# EAGLE board tempSensorV1 (EAGLE 7.2.0)
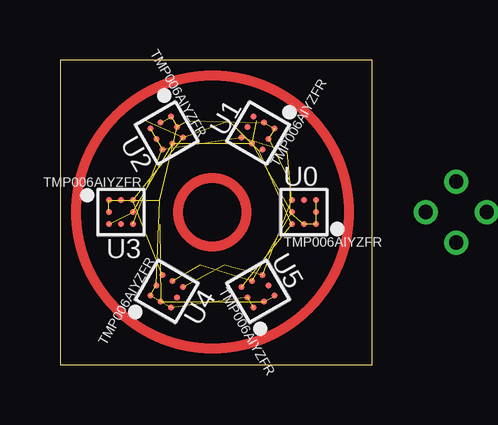
[diagram p0: board, top side]
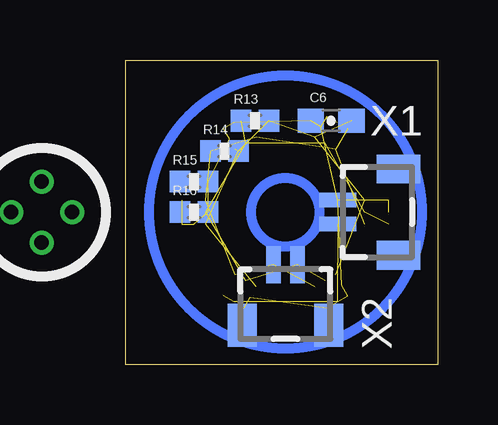
[diagram p1: board, bottom side, seen from below]

Size 13.01 x 12.69 mm. Coordinates in mm from the lower left corner, seen from the top.
Outline: 0,0 13.01,0 13.01,12.69 0,12.69 0,0
Copper layers (1*16): Top 0.035mm / dielectric 1.5mm / Bottom 0.035mm
Design rules "default": minimum track width 10mil, minimum drill 24mil, track to track 8mil, track to pad 8mil, pad to pad 8mil, via to via 8mil, smd to smd 8mil, copper to edge 40mil, drill to drill 8mil, minimum pad ring 10mil, minimum via ring 8mil, stop-mask expansion 4mil, vias tented up to drill 0mil, thermal gap 10mil

## Footprints (pad centres in the part's own frame; a part is rotated, then mirrored left to right if it is on the bottom)
0603-CAP = smd 1.1 x 1: 1 -0.85,0; 2 0.85,0
0402-RES = smd 0.85 x 0.9: 1 -0.58,0; 2 0.58,0
WCSP-8 = smd 0.25 x 0.25: A1 0.5,-0.5; A2 0,-0.5; A3 -0.5,-0.5; B1 0.5,0; B3 -0.5,0; C1 0.5,0.5; C2 0,0.5; C3 -0.5,0.5
BM02B-SRSS-TB = smd 0.6 x 1.55: 1 0.5,-1.625; 2 -0.5,-1.625 | smd 1.2 x 1.8: FIT@1 1.8,0.9; FIT@2 -1.8,0.9
SSW-104-02-S-S = drill 1 pad 1.5 octagon: 1 -3.81,0; 2 -1.27,0; 3 1.27,0; 4 3.81,0

## Placement (x,y rotation side)
C6  10uF  [0603-CAP]  4.45,10.16 0 bottom
R13  10k  [0402-RES]  7.62,10.16 0 bottom
R14  10k  [0402-RES]  8.89,8.89 0 bottom
R15  10k  [0402-RES]  10.16,7.62 0 bottom
R16  10k  [0402-RES]  10.16,6.35 0 bottom
U0  TMP006AIYZFR  [WCSP-8]  10.16,6.35 0 top
U1  TMP006AIYZFR  [WCSP-8]  8.26,9.65 60 top
U2  TMP006AIYZFR  [WCSP-8]  4.45,9.65 120 top
U3  TMP006AIYZFR  [WCSP-8]  2.54,6.35 180 top
U4  TMP006AIYZFR  [WCSP-8]  4.45,3.05 240 top
U5  TMP006AIYZFR  [WCSP-8]  8.26,3.05 300 top
X1  BM02B-SRSS-TB  [BM02B-SRSS-TB]  2.54,6.35 270 bottom
X2  BM02B-SRSS-TB  [BM02B-SRSS-TB]  6.35,2.54 180 bottom
X3  SSW-104-02-S-S  [SSW-104-02-S-S]  6.35,-8.26 0 top  (outside the outline)

## Library data of the parts
C6 = SparkFun-Capacitors; PROD_ID: CAP-11015
R13-R16 = SparkFun-Resistors
U0 U1-U5 = microbuilder
X1 X2 = con-jst2
X3 = con-samtec; MPN: SSW-104-02-S-S; OC_FARNELL: unknown; OC_NEWARK: 11P9384

## Nets
ADDR0: R15.1
ADDR1: R16.1
DRDY0: U0.C2
DRDY1: U1.C2
DRDY2: U2.C2
DRDY3: U3.C2
DRDY4: U4.C2
DRDY5: U5.C2
GND: C6.1 R15.2 R16.2 U0.A1 U0.A2 U0.B1 U0.C1 U1.A1 U1.A2 U1.B1 U2.A1 U2.A2 U2.B1 U3.A1 U3.A2 U3.B1 U4.A1 U4.A2 U4.C1 U5.A1 U5.A2 X1.2
SCL: R13.1 U0.B3 U1.B3 U2.B3 U3.B3 U3.C1 U4.B3 U5.B3 X2.2
SDA: R14.1 U0.C3 U1.C3 U2.C1 U2.C3 U3.C3 U4.C3 U5.C3 X2.1
V-CAP: C6.2 R13.2 R14.2 U0.A3 U1.A3 U2.A3 U3.A3 U4.A3 U5.A3
VCC: U4.B1 U5.B1 U5.C1 X1.1

## Tracks (layer width: path | path; a pad name or v marks a point on that pad's centre or on a via)
GND  (21 unrouted)
N$1  (via drill 0.6 pad 0.45)
  other vias: 16.51,7.62
N$2  (via drill 0.6 pad 0.45)
  other vias: 16.51,5.08
N$3  (via drill 0.6 pad 0.45)
  other vias: 17.78,6.35
N$4  (via drill 0.6 pad 0.45)
  other vias: 15.24,6.35
SCL  (8 unrouted)
SDA  (8 unrouted)
V-CAP  (8 unrouted)
VCC  (3 unrouted)
(copper drawn outside any net)
  shapes: Bottom circle x2, Top circle x2